# Altium PCB Controller_TRK.PcbDoc (part 2 of 2)
Units mm, origin at the board's own origin, x right, y up, seen from the top; angles counter-clockwise.
Board outline 95.06 x 95 mm, 2 copper layers (Top Layer, Bottom Layer); 192 components, 119 nets, 532 pads, 364 vias.
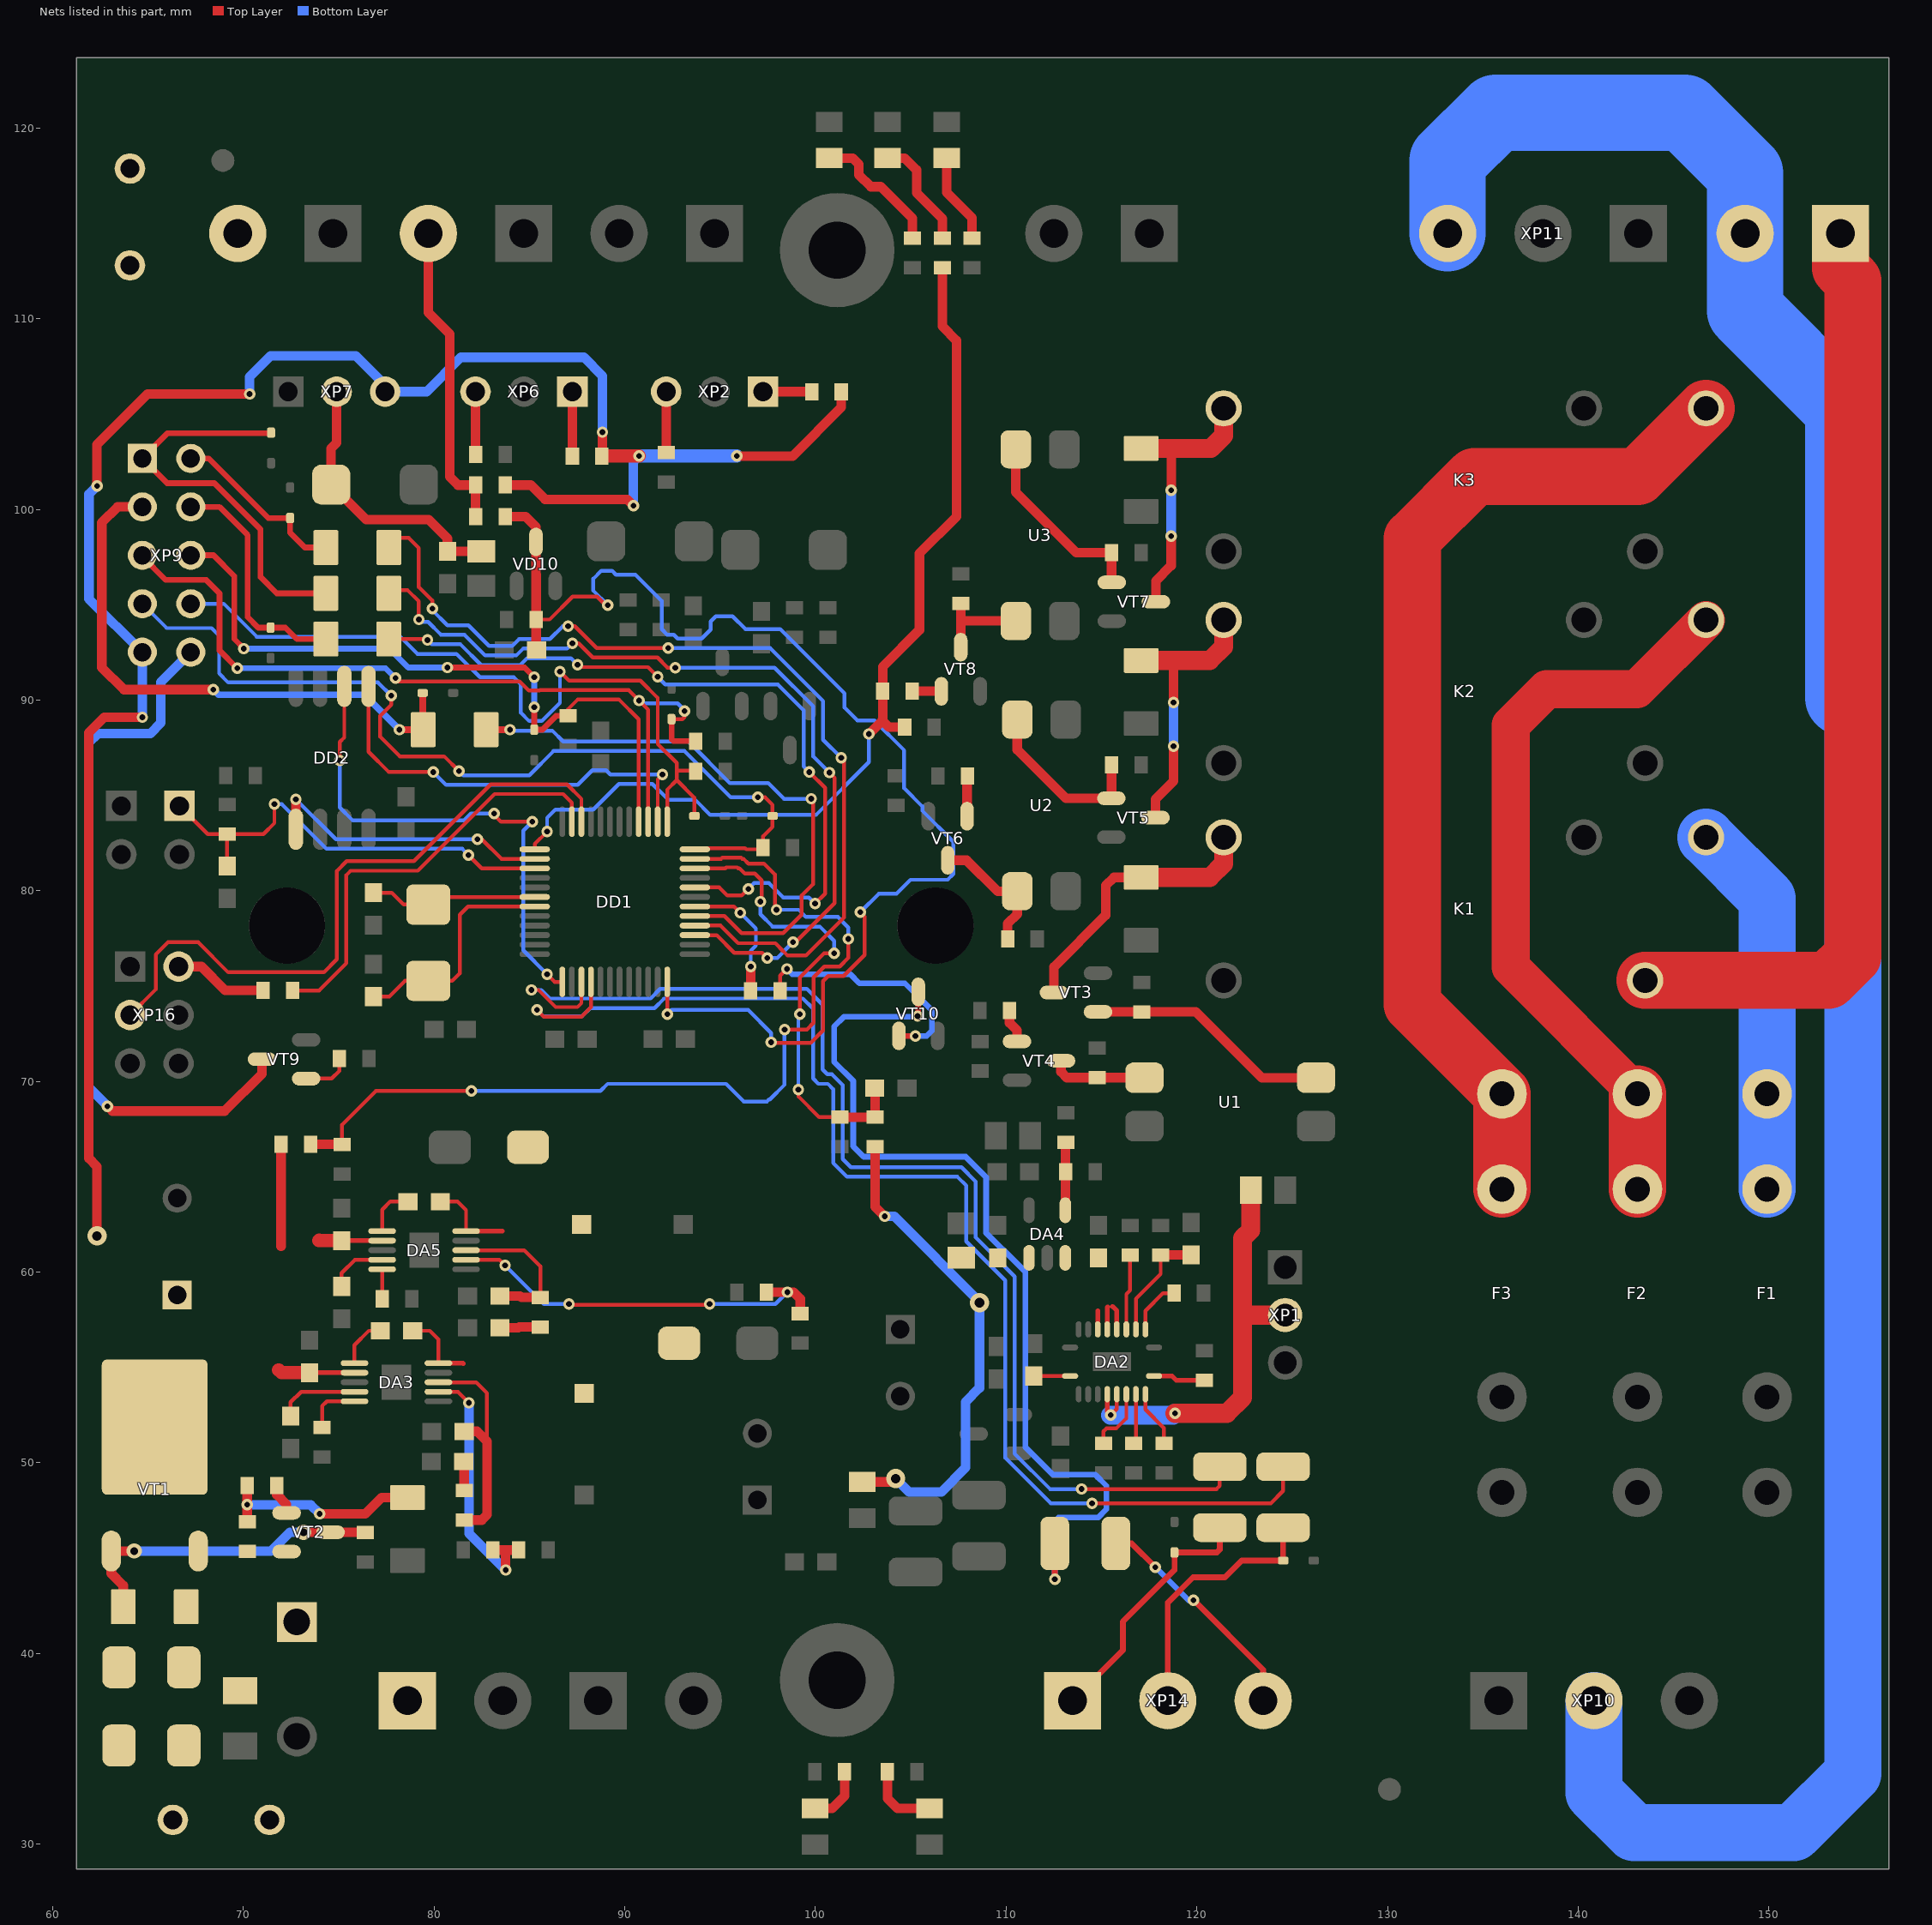
[diagram p2: the nets of this part, all layers, seen from the top]

## Via types
v1: diameter 0.6, hole 0.3, Top Layer to Bottom Layer, 357 vias
v2: diameter 1, hole 0.5, Top Layer to Bottom Layer, 5 vias
v3: diameter 0.8, hole 0.4, Top Layer to Bottom Layer, 2 vias

## Nets (pads, with @x,y where several pads share a name; then routed paths per layer and width w, separated by ;. In a path a pad name is that pad's centre, name@x,y a point inside that pad or via, vN(x,y) a via of type N, cw(c..) or ccw(c..) an arc to the next point about the centre after c; other vN are vias at no path point) (continued)
MOSI: DD1.38 DD2.5 | length 22.6
  Top Layer w0.2: DD2.5@76.56,90.718 76.56,87.29 77.625,86.225 v1(79.95,86.225) ; DD1.38@91.725,83.625 91.725,85.85 v1(91.975,86.1)
  Bottom Layer w0.2: v1(79.95,86.225) 80.621,85.554 87.529,85.554 88.3,86.325 89.015,86.325 89.24,86.1 v1(91.975,86.1)
N: XP8.2 XP10.2 XP11.3 | length 128.4
  Bottom Layer w3: XP10.2@140.825,37.525 140.825,32.702 142.925,30.602 151.302,30.602 154.4,33.7 154.4,90.125
  Bottom Layer w4: XP11.3@133.15,114.475 133.15,118.275 135.675,120.8 145.575,120.8 148.75,117.625 XP8.2@148.75,114.475 148.75,110.425 153.9,105.275 153.9,90.125
NetC1_2: C1.2 C2.2 FU1.2 VD1.2 XP7.2 | length 14.7
  Top Layer w0.5: XP7.2@74.89,106.175 74.89,103.49 74.6,103.2 VD1.2@74.6,101.3 76.435,99.465 79.71,99.465 80.7,98.475 C2.2@80.7,97.8 C1.2@82.475,97.8
NetC4_1: C4.1 DA2.1 | length 1.9
  Top Layer w0.2: C4.1@111.45,54.55 DA2.1@113.35,54.55
NetC7_2: C7.2 DA2.5 DA2.6 XP1.2 | length 23
  Top Layer w0.2: v1(115.475,52.5) 115.8,52.825 DA2.6@115.8,53.6
  Top Layer w0.25: DA2.5@115.3,53.6 115.3,52.675 v1(115.475,52.5)
  Top Layer w1: v1(118.85,52.6) 121.575,52.6 122.4,53.425 122.4,57.75 ; C7.2@122.825,64.3 122.825,62.2 122.4,61.775 122.4,57.75 ; XP1.2@124.625,57.75 122.4,57.75
  Bottom Layer w1: v1(115.475,52.5) 118.75,52.5 v1(118.85,52.6)
NetC8_1: C8.1 DA2.13 R10.1 | length 6
  Top Layer w0.2: DA2.13@116.8,57 116.8,58.6 118.1,59.9 R10.1@118.1,60.9
  Top Layer w0.5: R10.1@118.1,60.9 C8.1@119.7,60.9
NetC20_2: C20.2 R29.2 VD11.2 VD12.2 VD13.2 VD14.2 VT1.3 VT2.2
NetC21_1: C21.1 DA3.10 L1.1 VD16.2 | length 4.1
  Top Layer w0.2: C21.1@78.875,56.925 79.775,56.925 80.225,56.475 DA3.10@80.225,55.225
  Top Layer w0.25: DA3.10@80.225,55.225 81.5,55.225 81.525,55.2
NetC21_2: C21.2 DA3.1 | length 2.6
  Top Layer w0.2: DA3.1@75.825,55.225 75.825,56.175 76.575,56.925 C21.2@77.175,56.925
NetC26_1: C26.1 DA3.4 | length 4.3
  Top Layer w0.2: C26.1@72.475,52.45 72.475,53.175 73.025,53.725 DA3.4@75.825,53.725
NetC27_1: C27.1 DA3.8 R33.2 | length 11.9
  Top Layer w0.2: DA3.8@80.225,54.225 82.2,54.225 82.775,53.65 82.775,51.125
  Top Layer w0.5: R33.2@81.575,47.001 82.501,47.001 82.775,47.275 82.775,51.125 82.25,51.65 C27.1@81.575,51.65
NetC28_1: C28.1 R33.1 | length 1.5
  Top Layer w0.5: C28.1@81.55,50.075 81.575,50.05 R33.1@81.575,48.55
NetC33_1: C33.1 DA5.10 L2.1 VD17.2 | length 4.5
  Top Layer w0.2: C33.1@80.325,63.7 81.225,63.7 81.675,63.25 DA5.10@81.675,62.15
  Top Layer w0.25: DA5.10@81.675,62.15 83.575,62.15
NetC33_2: C33.2 DA5.1 | length 2.7
  Top Layer w0.2: DA5.1@77.275,62.15 77.275,63.275 77.7,63.7 C33.2@78.625,63.7
NetC38_1: C38.1 DA5.4 | length 3.1
  Top Layer w0.2: C38.1@75.15,59.25 75.15,59.95 75.85,60.65 76.2,60.65 DA5.4@77.275,60.65
NetC39_1: C39.1 DA5.8 R40.2 | length 8
  Top Layer w0.2: DA5.8@81.675,61.15 84.725,61.15 85.575,60.3 R40.2@85.575,58.674
  Top Layer w0.5: C39.1@83.45,58.75 84.5,58.75 84.576,58.674 R40.2@85.575,58.674
NetC40_1: C40.1 R40.1 | length 2.1
  Top Layer w0.5: C40.1@83.45,57.075 84.425,57.075 84.475,57.125 R40.1@85.575,57.125
NetDA2_7: DA2.7 R5.1 | length 3.4
  Top Layer w0.2: R5.1@115.1,51.025 115.1,51.65 115.25,51.8 115.765,51.8 116.3,52.335 DA2.7@116.3,53.6
NetDA2_8: DA2.8 R8.1 | length 2.5
  Top Layer w0.2: DA2.8@116.8,53.6 116.8,51.15 R8.1@116.825,51.175
NetDA2_9: DA2.9 R6.1 | length 3
  Top Layer w0.2: DA2.9@117.325,53.575 DA2.9@117.3,53.6 117.3,52.8 118.275,51.825 R6.1@118.275,51.025
NetDA2_10: DA2.10 R9.1 | length 2.7
  Top Layer w0.25: DA2.10@117.75,54.55 118.7,54.55 118.925,54.325 R9.1@120.4,54.325
NetDA2_12: DA2.12 R7.1 | length 2.9
  Top Layer w0.2: DA2.12@117.3,57 117.3,57.975 118.225,58.9 R7.1@118.8,58.9
NetDA2_14: DA2.14 R4.1 | length 4
  Top Layer w0.2: DA2.14@116.3,57 116.3,58.85 116.5,59.05 R4.1@116.5,60.9
NetDA3_5: DA3.5 R34.2 | length 2.9
  Top Layer w0.2: R34.2@74.125,51.849 74.125,52.975 74.375,53.225 DA3.5@75.825,53.225
NetDA3_7: DA3.7 R32.1 R35.2 | length 13.8
  Top Layer w0.2: DA3.7@80.225,53.725 81.25,53.725 v1(81.825,53.15)
  Top Layer w0.5: R35.2@83.074,45.425 83.75,45.425 ; v1(83.75,44.375) 83.75,45.425 ; R32.1@84.425,45.425 83.75,45.425
  Bottom Layer w0.5: v1(81.825,53.15) 81.825,46.3 v1(83.75,44.375)
NetDA4_4: DA4.4 R36.1 R38.2 | length 3.6
  Top Layer w0.5: DA4.4@113.1,63.25 113.1,66.775 R36.1@113.125,66.8
NetDA5_5: DA5.5 R41.2 | length 1.6
  Top Layer w0.2: R41.2@77.276,58.6 DA5.5@77.275,60.15
NetDA5_7: DA5.7 R39.1 R42.2 | length 20.8
  Top Layer w0.2: DA5.7@81.675,60.65 83.425,60.65 v1(83.725,60.35) ; v1(87.075,58.325) 87.118,58.282 94.407,58.282 v1(94.45,58.325)
  Top Layer w0.5: R39.1@97.425,58.95 v1(98.525,58.95) 98.85,58.95 99.2,58.6 R42.2@99.2,57.824
  Bottom Layer w0.2: v1(83.725,60.35) 85.75,58.325 v1(87.075,58.325) ; v1(94.45,58.325) 97.9,58.325 v1(98.525,58.95)
NetDD1_27: DD1.27 VD6.2 | length 45.8
  Top Layer w0.2: VD6.2@77.626,95.775 78.6,95.775 79.2,95.175 v1(79.2,94.225) ; v1(87.25,92.975) 87.575,92.975 88.32,92.23 91.71,92.23 92.24,91.7 v1(92.65,91.7) ; DD1.27@93.675,77.675 94.811,77.675 95.736,76.75 97.2,76.75 v1(97.475,76.475) ; v1@98.825,77.425 v1(98.825,77.3) 98.95,77.3 101,79.35 101,85.925 v1(100.725,86.2)
  Bottom Layer w0.2: v1(79.2,94.225) 79.325,94.1 79.69,94.1 80.35,93.44 80.35,93.425 81.589,93.425 82.675,92.339 84.307,92.339 84.668,92.7 86.975,92.7 v1(87.25,92.975) ; v1(92.65,91.7) 97.857,91.7 99.875,89.682 99.875,87.05 v1(100.725,86.2) ; v1(97.475,76.475) 98,76.475 v1(98.825,77.3)
NetDD1_28: DD1.28 VD27.2 | length 49.8
  Top Layer w0.2: VD27.2@77.576,98.5 78.675,98.5 79.2,97.975 79.2,95.925 79.904,95.221 v1(79.904,94.805) ; v1(87.029,93.88) 87.378,93.88 88.528,92.73 v1(92.28,92.73) ; DD1.28@93.675,78.175 95.019,78.175 95.944,77.25 97.9,77.25 98.125,77.025 98.125,77.01 98.535,76.6 99.5,76.6 101.5,78.6 101.5,86.825 v1(101.35,86.975)
  Bottom Layer w0.2: v1(79.904,94.805) 79.904,94.721 80.7,93.925 81.796,93.925 82.882,92.839 84.1,92.839 84.461,93.2 86.075,93.2 86.755,93.88 v1(87.029,93.88) ; v1(92.28,92.73) 97.62,92.73 100.4,89.95 100.4,87.925 v1(101.35,86.975)
NetDD1_29: DD1.29 VD24.2 | length 31.3
  Top Layer w0.2: DD1.29@93.675,78.675 95.226,78.675 96.126,77.775 98.3,77.775 99.275,78.75 99.275,79.75 99.875,80.35 99.875,84.725 v1(99.775,84.825)
  Top Layer w0.35: VD24.2@82.726,88.45 v1(83.975,88.45)
  Bottom Layer w0.2: v1(83.975,88.45) 84.025,88.4 86.196,88.4 86.771,87.825 93.332,87.825 95.507,85.65 97.525,85.65 98.35,84.825 v1(99.775,84.825)
NetDD1_30: DD1.30 R62.1 | length 7.1
  Top Layer w0.2: DD1.30@93.675,79.175 95.725,79.175 v1(96.05,78.85)
  Top Layer w0.5: R62.1@96.6,74.75 v1@96.6,76.024
  Bottom Layer w0.2: v1(96.05,78.85) 96.875,78.025 96.875,77.125 96.605,76.855 v1(96.605,76.029)
NetDD1_32: DD1.32 VD28.2 | length 41.7
  Top Layer w0.2: VD28.2@77.626,93.2 79.7,93.2 v1(79.65,93.15) ; v1(87.525,91.85) 87.645,91.73 91.22,91.73 v1(91.725,91.225) ; DD1.32@93.675,80.175 94.95,80.175 95.375,79.75 96.125,79.75 v1(96.475,80.1) ; v1(99.675,86.225) 100.5,85.4 100.5,79.85 v1(99.975,79.325)
  Bottom Layer w0.2: v1(79.65,93.15) 79.875,92.925 81.382,92.925 82.475,91.832 84.507,91.832 84.875,92.2 87.175,92.2 v1(87.525,91.85) ; v1(91.725,91.225) 92.125,90.825 98.025,90.825 99.375,89.475 99.375,86.525 v1(99.675,86.225) ; v1(96.475,80.1) 96.775,80.4 97.562,80.4 98.312,79.65 99.65,79.65 v1(99.975,79.325)
NetDD1_36: DD1.36 R2.2 VD33.2 XP9.7 | length 47.8
  Top Layer w0.2: v1(77.754,90.229) 77.754,89.754 77.175,89.175 77.175,88.075 78.2,87.05 80.525,87.05 v1(81.3,86.275) ; DD1.36@93.675,82.175 93.729,82.229 96.309,82.229 96.363,82.175 97.151,82.175 R2.2@97.251,82.275 97.251,82.851 97.75,83.35 VD33.2@97.75,83.925 97.75,84.5 97.35,84.9 v1(96.975,84.9)
  Bottom Layer w0.2: XP9.7@64.7,95.055 65.98,93.775 68.325,93.775 68.725,93.375 68.725,91.4 69.2,90.925 77.058,90.925 v1(77.754,90.229) ; v1(81.3,86.275) 81.521,86.054 84.989,86.054 86.26,87.325 93.125,87.325 95.55,84.9 v1(96.975,84.9)
NetDD1_37: DD1.37 R1.2 VD34.2 XP9.8 | length 40.9
  Top Layer w0.2: v1(86.6,91.5) 87.075,91.025 90.814,91.025 91.725,90.114 91.725,87.7 92.725,86.7 92.725,86.3 ; DD1.37@92.225,83.625 92.225,85.3 92.725,85.8 ; VD34.2@93.65,83.925 93.65,84.875 92.725,85.8 ; R1.2@93.726,86.275 93.701,86.3 92.725,86.3 ; 92.725,85.8 92.725,86.3
  Bottom Layer w0.2: XP9.8@67.55,95.055 68.97,95.055 70.7,93.325 78.225,93.325 79.125,92.425 81.175,92.425 82.4,91.2 84.175,91.2 84.55,90.825 84.55,89.335 84.985,88.9 85.65,88.9 86.6,89.85 v1(86.6,91.5)
  Bottom Layer w0.3: XP9.8@67.24,95.055 XP9.8@67.55,95.055
NetDD1_39: DD1.39 R60.2 VD31.2 XP9.5 | length 43.5
  Top Layer w0.2: v1@78.025,91.1 78.14,90.985 84.475,90.985 84.96,90.5 85.54,90.5 85.565,90.525 90.2,90.525 91.225,89.5 DD1.39@91.225,83.625 ; VD31.2@92.45,89 93.025,89 93.13,89.105 v1(93.13,89.429)
  Top Layer w0.3: XP9.5@64.7,97.595 64.7,97.525 65.925,96.3 68.05,96.3 68.75,95.6 68.75,92.6 v1(69.675,91.675) ; VD31.2@92.45,89 92.45,87.95 92.55,87.85 R60.2@93.726,87.85
  Bottom Layer w0.2: v1(90.75,89.975) 90.9,89.825 92.775,89.825 93.13,89.47 v1(93.13,89.429)
  Bottom Layer w0.3: v1(69.675,91.675) 77.45,91.675 v1(77.975,91.15)
NetDD1_40: DD1.40 R3.2 VD32.2 XP9.6 | length 37.5
  Top Layer w0.2: R3.2@87.025,89.174 87.025,89.525 87.525,90.025 89.7,90.025 90.725,89 DD1.40@90.725,83.625
  Top Layer w0.3: XP9.6@67.24,97.595 68.43,97.595 69.525,96.5 69.525,93.2 v1(70.025,92.7) ; v1(80.704,91.704) 84.746,91.704 v1(85.25,91.2) ; v1(85.25,89.625) VD32.2@85.25,88.45 85.675,88.45 86.399,89.174 R3.2@87.025,89.174
  Bottom Layer w0.3: v1(70.025,92.7) 77.65,92.7 78.646,91.704 v1(80.704,91.704) ; v1(85.25,89.625) v1(85.25,91.2)
NetF1_2: F1.2 K1.14 | length 19.8
  Bottom Layer w3: K1.14@146.7,82.8 149.9,79.6 F1.2@149.9,69.35 F1.2@149.9,64.35
NetF2_2: F2.2 K2.14 | length 39.6
  Top Layer w2: F2.2@143.1,69.35 136.45,76 136.45,88.675 138.35,90.575 143.075,90.575 K2.14@146.7,94.2
  Top Layer w3: F2.2@143.1,64.35 F2.2@143.1,69.35
NetF3_2: F3.2 K3.14 | length 54.3
  Top Layer w3: F3.2@136,64.35 F3.2@136,69.35 131.3,74.05 131.3,98.475 134.55,101.725 143.125,101.725 K3.14@146.7,105.3
NetFU4_2: FU4.2 VD11.1 VD12.1
NetFU5_1: FU5.1 VD35.2 XP14.1 | length 13.6
  Top Layer w0.3: XP14.1@113.475,37.525 116.125,40.175 116.125,41.675 118.825,44.375 VD35.2@118.825,45.3 121.05,45.3 121.2,45.45 FU5.1@121.2,46.6
NetFU6_1: FU6.1 VD36.2 XP14.2 | length 13.8
  Top Layer w0.3: XP14.2@118.475,37.525 118.475,42.675 119.8,44 121.475,44 122.35,44.875 VD36.2@124.525,44.875 FU6.1@124.525,46.6
NetFU7_1: FU7.1 VT10.3 | length 49.4
  Top Layer w0.3: v1(105.35,73.425) 105.391,73.466 VT10.3@105.391,74.699 ; v1(112.55,43.9) FU7.1@112.55,45.775
  Bottom Layer w0.3: v1(105.35,73.425) 105.325,73.4 101.5,73.4 100.975,72.875 100.975,71.035 101.975,70.035 101.975,66.6 102.525,66.05 107.878,66.05 108.95,64.978 108.95,62.053 109.853,61.15 109.875,61.15 111,60.025 111,50.825 112.45,49.375 114.675,49.375 115.256,48.794 115.256,47.567 114.816,47.127 112.752,47.127 112.55,46.925 v1(112.55,43.9)
NetFU7_2: FU7.2 XP14.3 | length 12.1
  Top Layer w0.3: FU7.2@115.75,45.775 116.575,45.775 v1(117.825,44.525) ; v1(119.825,42.8) 123.475,39.15 XP14.3@123.475,37.525
  Bottom Layer w0.3: v1(117.825,44.525) 119.55,42.8 v1(119.825,42.8)
NetK1_2: K1.2 VD18.1 VT3.3 | length 14.8
  Top Layer w0.5: VT3.3@112.501,74.666 112.501,76.001 115.225,78.725 115.225,80.275 115.651,80.701 VD18.1@117.075,80.701
  Top Layer w1: VD18.1@117.075,80.701 120.676,80.701 121.4,81.425 K1.2@121.4,82.8
NetK2_2: K2.2 VD19.1 VT5.3 | length 14.6
  Top Layer w0.5: VT5.3@117.824,83.834 117.824,84.799 118.775,85.75 v1(118.775,87.575) ; v1(118.775,89.875) 118.775,91.976
  Top Layer w1: VD19.1@117.075,92.076 120.676,92.076 121.4,92.8 K2.2@121.4,94.2
  Bottom Layer w0.5: v1(118.775,87.575) v1(118.775,89.875)
NetK3_2: K3.2 VD20.1 VT7.3 | length 14.4
  Top Layer w0.5: VT7.3@117.849,95.159 117.849,96.249 118.65,97.05 v1(118.65,98.6) ; v1(118.656,101.005) 118.656,103.107 118.75,103.201
  Top Layer w1: VD20.1@117.075,103.201 118.75,103.201 120.726,103.201 121.4,103.875 K3.2@121.4,105.3
  Bottom Layer w0.5: v1(118.65,98.6) 118.65,100.999 v1(118.656,101.005)
NetR11_2: R11.2 XP2.1 | length 2.6
  Top Layer w0.5: XP2.1@97.25,106.175 R11.2@99.801,106.175
NetR12_2: R12.2 XP2.3 | length 3.2
  Top Layer w0.5: XP2.3@92.17,106.175 92.17,102.979 R12.2@92.175,102.974
NetR13_2: R13.2 XP6.1 | length 3.4
  Top Layer w0.5: R13.2@87.25,102.801 XP6.1@87.25,106.175
NetR14_2: R14.2 XP6.3 | length 3.2
  Top Layer w0.5: R14.2@82.17,102.994 XP6.3@82.17,106.175
NetR16_1: R16.1 VD7.1 | length 3.1
  Top Layer w0.5: VD7.1@99.975,31.875 100.875,31.875 101.525,32.525 R16.1@101.525,33.8
NetR17_1: R17.1 VD8.1 | length 3.8
  Top Layer w0.5: R17.1@103.775,33.8 103.775,32.4 104.3,31.875 VD8.1@105.975,31.875
NetR18_2: R18.2 XP16.2 | length 4.9
  Top Layer w0.5: XP16.2@66.6,76.025 67.8,76.025 69.05,74.775 R18.2@71.026,74.775
NetR29_1: R29.1 R30.2 VD15.2 | length 10.8
  Top Layer w0.5: R29.1@70.2,46.9 v1(70.2,47.8) R30.2@70.2,48.799 ; v1(74,47.325) 76.4,47.325 77.251,48.176 VD15.2@78.6,48.176
  Bottom Layer w0.5: v1(70.2,47.8) 73.525,47.8 v1(74,47.325)
NetR30_1: R30.1 VT2.1 | length 1.6
  Top Layer w0.5: R30.1@71.75,48.8 71.75,48.325 72.263,47.812 VT2.1@72.263,47.375
NetR31_2: R31.2 VD13.1 VT1.1 VT2.3 | length 16.9
  Top Layer w0.5: VD13.1@63.699,42.45 63.699,43.576 63.07,44.205 VT1.1@63.07,45.375 v3(64.275,45.375) ; v3(73.154,46.352) 74.567,46.352 VT2.3@74.574,46.359 76.39,46.359 R31.2@76.4,46.349
  Bottom Layer w0.5: v3(64.275,45.375) 71.45,45.375 72.427,46.352 v3(73.154,46.352)
NetR43_1: R43.1 U1.4 VT3.1 | length 12.9
  Top Layer w0.5: VT3.1@114.812,73.65 R43.1@117.1,73.65 119.95,73.65 123.405,70.195 U1.4@126.25,70.195
NetR44_1: R44.1 U1.1 VT4.3 | length 5.1
  Top Layer w0.5: VT4.3@112.874,71.084 112.874,70.501 113.175,70.2 R44.1@114.775,70.2 117.245,70.2 U1.1@117.25,70.195
NetR45_1: R45.1 VT4.1 | length 1.8
  Top Layer w0.5: R45.1@110.175,73.725 110.175,73.075 110.563,72.687 VT4.1@110.563,72.1
NetR47_1: R47.1 U2.4 VT5.1 | length 9.3
  Top Layer w0.5: U2.4@110.58,88.975 110.58,87.395 113.125,84.85 VT5.1@115.513,84.85 115.525,84.862 R47.1@115.525,86.6
NetR48_1: R48.1 U2.1 VT6.3 | length 7
  Top Layer w0.5: VT6.3@106.934,81.601 107.924,81.601 109.55,79.975 U2.1@110.58,79.975 110.58,78.78 110.075,78.275 R48.1@110.075,77.475
NetR49_1: R49.1 VT6.1 | length 2.1
  Top Layer w0.5: VT6.1@107.95,83.912 107.95,86 R49.1@107.975,86.025
NetR51_1: R51.1 U3.4 VT7.1 | length 10.1
  Top Layer w0.5: U3.4@110.505,103.15 110.505,100.895 113.675,97.725 R51.1@115.525,97.725 115.525,96.188 VT7.1@115.538,96.175
NetR52_1: R52.1 U3.1 VT8.3 | length 5.1
  Top Layer w0.5: VT8.3@107.625,92.783 R52.1@107.625,95.075 ; 107.675,94.15 U3.1@110.505,94.15
NetR53_1: R53.1 VT8.1 | length 1.5
  Top Layer w0.5: R53.1@105.075,90.475 106.588,90.475 VT8.1@106.6,90.463
NetR55_2: R55.2 VD21.1 | length 7
  Top Layer w0.5: VD21.1@100.725,118.425 101.95,118.425 102.275,118.1 102.275,117.55 102.9,116.925 103.425,116.925 105.075,115.275 R55.2@105.075,114.224
NetR56_2: R56.2 VD22.1 | length 4.7
  Top Layer w0.5: VD22.1@106.875,118.425 106.875,116.625 108.2,115.3 R56.2@108.2,114.224
NetR57_2: R57.2 VD23.1 | length 5.9
  Top Layer w0.5: VD23.1@103.775,118.425 104.675,118.425 105.3,117.8 105.3,116.6 106.65,115.25 R57.2@106.65,114.224
NetR61_2: R61.2 VT9.1 | length 2.6
  Top Layer w0.2: VT9.1@73.287,70.15 74.625,70.15 75.026,70.551 R61.2@75.026,71.2
NetR62_2: R62.2 VT10.1 | length 12.7
  Top Layer w0.2: R62.2@98.149,74.75 98.149,75.549 v1(98.5,75.9)
  Top Layer w0.3: VT10.1@104.375,72.388 v1(105.237,72.388)
  Bottom Layer w0.3: v1(98.5,75.9) 98.775,75.625 101.825,75.625 102.3,75.15 104.686,75.15 106.1,73.736 106.1,72.65 105.838,72.388 v1(105.237,72.388)
NetVD6_1: VD6.1 VD26.2 XP9.1 | length 21.3
  Top Layer w0.3: VD26.2@71.45,104.025 71.425,104 66.025,104 XP9.1@64.7,102.675 66,101.375 68.475,101.375 70.9,98.95 70.9,96.45 71.75,95.6 VD6.1@74.324,95.6
NetVD24_1: VD24.1 VD25.2 XP9.3 | length 30.3
  Top Layer w0.35: v1(78.175,88.45) 79.376,88.45 79.4,88.474 VD25.2@79.4,90.375
  Top Layer w0.5: XP9.3@64.84,100.135 XP9.3@64.7,100.135 63.41,100.135 62.575,99.3 62.575,91.7 63.725,90.55 v1(68.425,90.55)
  Bottom Layer w0.35: v1(68.425,90.55) 68.7,90.275 76.35,90.275 v1(78.175,88.45)
NetVD27_1: VD27.1 VD29.2 XP9.2 | length 9.5
  Top Layer w0.3: XP9.2@67.24,102.675 68.175,102.675 71.3,99.55 VD29.2@72.45,99.55 72.45,98.775 73.225,98 VD27.1@74.324,98
NetVD28_1: VD28.1 VD30.2 XP9.4 | length 12.5
  Top Layer w0.3: XP9.4@67.24,100.135 68.74,100.135 70.225,98.65 70.225,94.35 70.775,93.8 VD30.2@71.425,93.8 72.2,93.8 72.8,93.2 VD28.1@74.324,93.2
NetVT9_3: VT9.3 XP9.10 | length 37.8
  Top Layer w0.5: v1(62.875,68.7) 63.125,68.45 69.025,68.45 70.976,70.401 VT9.3@70.976,71.166
  Bottom Layer w0.5: v1(62.875,68.7) 61.888,69.687 61.888,87.763 62.375,88.25 65.125,88.25 65.675,88.8 65.675,90.95 XP9.10@67.24,92.515
PISTOL: R15.1 R27.1 XP12.2 | length 16.4
  Top Layer w0.5: XP12.2@79.7,114.475 79.7,110.325 80.82,109.205 80.82,101.705 81.25,101.275 R15.1@82.175,101.275 R27.1@82.175,99.625
PISTOL_MCU: C19.2 DD1.24 R27.2 R28.2 VD10.3 | length 70.5
  Top Layer w0.2: R28.2@85.349,94.225 86.058,94.225 87.258,95.425 88.55,95.425 89,94.975 89.005,94.98 v1(89.104,94.98) ; v1(92.225,73.525) DD1.24@92.225,75.225 ; v1(97.68,72.054) 97.708,72.025 99.75,72.025 100.4,72.675 100.4,75.261 100.664,75.525 101.472,75.525 102.58,76.633 102.58,78.645 v1(102.35,78.875)
  Top Layer w0.5: R27.2@83.724,99.625 84.8,99.625 85.341,99.084 VD10.3@85.341,98.299 85.341,95.559 ; 85.349,96.592 R28.2@85.349,94.225 85.349,92.651 C19.2@85.375,92.625
  Bottom Layer w0.2: v1(89.104,94.98) 88.35,95.734 88.35,96.365 88.76,96.775 89.34,96.775 89.54,96.575 90.557,96.575 91.935,95.197 91.935,93.715 92.22,93.43 92.569,93.43 92.769,93.23 94.03,93.23 94.5,93.7 94.5,94.125 94.775,94.4 95.65,94.4 96.32,93.73 98.145,93.73 101.525,90.35 101.525,89.6 102.2,88.925 103.09,88.925 104.65,87.365 104.65,85.375 105.6,84.425 105.6,84.197 107.225,82.572 107.225,80.875 106.927,80.577 104.977,80.577 104.25,79.85 103.325,79.85 v1(102.35,78.875) ; v1(92.225,73.525) 92.45,73.75 96.469,73.75 97.675,72.544 97.675,72.058 v1(97.68,72.054)
PUMP_L: K1.11 XP8.1 | length 49.6
  Top Layer w3: K1.11@143.5,75.3 153.125,75.3 154.4,76.575 154.4,112 153.75,112.65 XP8.1@153.75,114.475
PUMP_RELAY: DD1.1 R53.2 R54.2 R57.1 | length 50.8
  Top Layer w0.2: DD1.1@85.275,82.175 85.275,82.45 v1(85.925,83.1) ; 103.474,88.899 103.526,88.899
  Top Layer w0.5: v1(102.8,88.225) 103.474,88.899 ; R54.2@104.676,88.575 103.85,88.575 103.526,88.899 R53.2@103.526,90.475 103.526,91.751 105.45,93.675 105.45,97.681 107.4,99.631 107.4,108.85 106.65,109.6 R57.1@106.65,112.675
  Bottom Layer w0.2: v1(85.925,83.1) 85.925,83.825 86.354,84.254 88.344,84.254 89.69,85.6 91.45,85.6 92.271,84.779 93.681,84.779 94.485,83.975 100.025,83.975 102.8,86.75 v1(102.8,88.225)
RESET: C15.2 DD1.3 J1.1 R23.2 | length 23.5
  Top Layer w0.2: J1.1@66.65,84.45 68.124,82.976 R23.2@69.15,82.976 ; C15.2@69.15,81.3 R23.2@69.15,82.976 ; v1(71.625,84.55) 71.625,83.55 71.051,82.976 R23.2@69.15,82.976 ; v1(81.8,81.875) 82.5,81.175 DD1.3@85.275,81.175
  Bottom Layer w0.2: v1(71.625,84.55) 72.01,84.55 74.36,82.2 81.475,82.2 v1(81.8,81.875)
RXD: DD1.46 XP16.3 | length 35.3
  Top Layer w0.2: XP16.3@64.06,73.485 65.4,74.825 65.4,76.65 66.05,77.3 67.625,77.3 69.2,75.725 74.218,75.725 74.9,76.407 74.9,81.032 75.418,81.55 78.943,81.55 82.968,85.575 86.975,85.575 87.725,84.825 DD1.46@87.725,83.625
SCK: DD1.13 DD2.6 | length 26.9
  Top Layer w0.2: v1@75.071,86.829 v1(75.054,86.829) 75.054,87.804 75.29,88.04 DD2.6@75.29,90.718 ; v1@83.125,84 83.5,83.625 v1(85.15,83.625) ; v1(85.925,75.625) 86.325,75.225 DD1.13@86.725,75.225
  Bottom Layer w0.2: v1(75.054,86.829) 75.05,86.826 75.05,84.372 75.722,83.7 81.578,83.7 81.932,84.054 v1(83.154,84.054) ; v1(85.15,83.625) 84.675,83.15 84.675,76.875 v1(85.925,75.625)
SCL: DD1.15 FU5.2 | length 64.1
  Top Layer w0.2: v1(85.1,74.8) 85.475,74.8 86.375,73.9 87.518,73.9 87.725,74.107 DD1.15@87.725,75.225 ; v1(113.95,48.625) 121.025,48.625 121.2,48.8 FU5.2@121.2,49.8
  Bottom Layer w0.2: v1(85.1,74.8) 85.625,74.8 86.075,74.35 91.353,74.35 91.853,74.85 99.547,74.85 100.375,74.022 100.375,70.625 100.625,70.375 100.857,70.375 101.425,69.807 101.425,65.932 101.857,65.5 107.65,65.5 108.4,64.75 108.4,61.825 110.45,59.775 110.45,50.475 112.3,48.625 v1(113.95,48.625)
SDA: DD1.16 FU6.2 | length 68.2
  Top Layer w0.2: v1(85.4,73.75) 85.75,73.4 87.725,73.4 88.225,73.9 DD1.16@88.225,75.225 ; v1(114.506,47.877) 123.877,47.877 124.525,48.525 FU6.2@124.525,49.8
  Bottom Layer w0.2: v1(85.4,73.75) 85.725,73.425 87.76,73.425 88.185,73.85 91.56,73.85 92.06,74.35 99.34,74.35 99.875,73.815 99.875,70.15 100.15,69.875 100.65,69.875 100.925,69.6 100.925,65.725 101.65,65 107.443,65 107.9,64.543 107.9,61.618 109.95,59.568 109.95,50.268 112.341,47.877 v1(114.506,47.877)
SS: DD1.2 DD2.1 | length 15.4
  Top Layer w0.2: v1(82.275,82.7) 82.5,82.7 83.525,81.675 DD1.2@85.275,81.675
  Top Layer w0.5: DD2.1@72.75,83.225 v1(72.75,84.8)
  Bottom Layer w0.2: v1(72.75,84.8) 74.85,82.7 v1(82.275,82.7)
TXD: DD1.47 R18.1 | length 22.8
  Top Layer w0.2: R18.1@72.575,74.775 73.975,74.775 75.4,76.2 75.4,80.825 75.625,81.05 79.15,81.05 83.175,85.075 86.768,85.075 87.225,84.618 DD1.47@87.225,83.625
V_IN: DD1.35 R19.1 R21.2 | length 49.1
  Top Layer w0.2: R21.2@75.175,66.699 75.174,67.724 76.95,69.5 v1(81.95,69.5) ; DD1.35@93.675,81.675 95.054,81.675 95.108,81.729 96.102,81.729 96.156,81.675 96.225,81.675 96.475,81.425 97.3,81.425 97.875,80.85 97.875,79.084 v1(97.955,79.004) ; v1@98.282,72.825 v1(98.382,72.725) 99.55,72.725 99.9,73.075 99.9,75.468 100.457,76.025 101.265,76.025 101.725,76.485 v1(101.725,77.475)
  Top Layer w0.5: R19.1@73.525,66.7 R21.2@75.175,66.699
  Bottom Layer w0.2: v1(81.95,69.5) 88.725,69.5 89.1,69.875 95.31,69.875 96.235,68.95 97.46,68.95 97.56,69.05 97.6,69.05 98.38,69.83 v1@98.38,72.725 ; v1(97.955,79.004) 99.121,79.004 99.5,78.625 101.175,78.625 101.725,78.075 v1(101.725,77.475)
V_SYS: C13.2 DD1.34 R20.1 R22.2 | length 25.4
  Top Layer w0.2: DD1.34@93.675,81.175 95.261,81.175 95.315,81.229 95.895,81.229 95.949,81.175 96.018,81.175 96.293,80.9 96.825,80.9 97.18,80.545 97.18,79.504 v1(97.105,79.429) ; v1(99.1,69.575) 99.1,69.221 100.197,68.124 R22.2@101.275,68.124 ; v1@99.275,73.625 v1(99.175,73.525) 99.175,75.45 100.45,76.725 v1(100.975,76.725)
  Top Layer w0.5: R22.2@101.275,68.124 R20.1@103.125,68.125 ; R20.1@103.125,68.125 C13.2@103.125,69.625
  Bottom Layer w0.2: v1(97.105,79.429) 97.105,78.77 97.75,78.125 100.225,78.125 100.975,77.375 v1(100.975,76.725) ; v1(99.1,69.575) 99.1,73.45 v1(99.175,73.525)
VBAT: C6.2 C31.2 C32.1 DA2.15 DA2.16 DA2.17 DA4.1 DA4.3 R20.2 R37.2 | length 29.5
  Top Layer w0.25: DA2.17@114.8,57 114.8,57.975 ; DA2.16@115.3,57 115.3,58.15 115.325,58.175 ; 115.575,58.2 115.8,57.975 DA2.15@115.8,57
  Top Layer w0.5: R37.2@102.45,49 104.025,49 v2(104.2,49.175) ; R20.2@103.125,66.576 103.125,63.425 v1(103.625,62.925)
  Bottom Layer w0.5: v1(103.625,62.925) 104.126,62.925 108.6,58.451 v2(108.6,58.4) 108.6,53.925 107.875,53.2 107.875,49.748 106.602,48.475 104.9,48.475 v2(104.2,49.175)
VIN: FU4.1 XP3.1
VIN_F: C24.2 C25.1 C37.1 DA3.2 DA5.2 R11.1 R13.1 R15.2 R19.2 VT1.2 XP7.3 XP9.9 | length 117.6
  Top Layer w0.25: C25.1@73.475,54.725 DA3.2@75.825,54.725 ; C37.1@75.15,61.65 DA5.2@77.275,61.65
  Top Layer w0.5: v2(62.325,61.9) 62.325,65.538 61.888,65.975 61.888,88.288 62.7,89.1 v1(64.7,89.1) ; v1(62.325,101.225) 62.325,103.4 64.975,106.05 v1(70.325,106.05) ; 71.976,61.349 R19.2@71.976,66.7 ; R15.2@83.724,101.275 85.075,101.275 85.825,100.525 90.125,100.525 v1(90.45,100.2) ; R13.1@88.8,102.8 88.825,102.825 v1(88.825,104.05) ; v1(95.875,102.8) 98.8,102.8 101.35,105.35 R11.1@101.35,106.175
  Top Layer w0.7: 71.85,54.875 72,54.725 C25.1@73.475,54.725 ; 73.975,61.675 73.95,61.65 C37.1@75.15,61.65 ; R13.1@88.8,102.8 v1(90.75,102.8)
  Bottom Layer w0.5: v1(62.325,101.225) 61.9,100.8 61.9,95.315 XP9.9@64.7,92.515 v1@64.7,89.225 ; v1(70.325,106.05) 70.325,106.95 71.425,108.05 75.9,108.05 77.43,106.52 XP7.3@77.43,106.175 79.6,106.175 81.4,107.975 87.85,107.975 88.825,107 v1(88.825,104.05) ; v1(90.45,100.2) 90.45,102.5 v1(90.75,102.8)
  Bottom Layer w0.7: v1(90.75,102.8) v1(95.875,102.8)
VOUT_F: FU1.1 XP15.2
XTAL1: C17.2 DD1.6 QR1.1 | length 8.9
  Top Layer w0.2: C17.2@76.827,79.9 77.775,79.9 78.4,79.275 79.8,79.275 80.2,79.675 DD1.6@85.275,79.675
XTAL2: C16.2 DD1.7 QR1.2 | length 12.2
  Top Layer w0.2: C16.2@76.825,74.45 77.65,74.45 78.475,75.275 79.8,75.275 80.95,75.275 81.35,75.675 81.35,78.75 81.775,79.175 DD1.7@85.275,79.175
pads on no net: DA2.2 DA2.3 DA2.18 DA3.3 DA3.6 DA5.3 DA5.6 DD1.14 DD1.22 DD1.23 DD1.31 DD1.42 DD1.43 DD1.48 K1.12 K2.12 K3.12 REP1.1 REP2.1 XP1.3 XP16.1 XP16.4 XP16.6

## Polygon pours and split planes (outlines as drawn)
GND on Top Layer "GND_L01_P036" (hatched 90Degree grid 0.15 track 0.2, remove dead copper, pour order 36): 61.238,123.702 151.3,123.702 151.3,28.702 61.238,28.702
VIN on Top Layer "VIN_L01_P000" (hatched 90Degree grid 0.15 track 0.2, remove dead copper, pour order 0): 75.75,40.25 75.75,36.725 75.75,34.3 75.225,33.775 74.375,32.925 72.725,32.925 69.9,32.925 69.3,32.325 69.025,32.05 69.025,28.702 78.727,28.702 79.75,29.725 81.2,31.175 81.2,33.375 81.2,40.25
NetFU4_2 on Top Layer "NETFU4_2_L01_P002" (hatched 90Degree grid 0.15 track 0.2, remove dead copper, pour order 2): 67.875,32.375 67.875,28.702 61.238,28.702 61.238,37.1 67.95,37.1 68.225,36.825 68.3,36.75 68.3,35.95 68.3,33.6 67.875,33.175
NetC20_2 on Top Layer "NETC20_2_L01_P004" (hatched 90Degree grid 0.15 track 0.2, remove dead copper, pour order 4): 61.625,41.125 65,41.125 65.25,41.125 65.525,41.4 65.825,41.7 65.825,42.9 65.825,46.025 66.35,46.55 66.525,46.725 67.475,46.725 68.35,46.725 68.725,46.35 69.025,46.05 69.875,46.05 73.025,46.05 73.675,45.4 74.65,44.425 74.65,40.925 74.65,39.7 73.95,39 72.05,37.1 70.375,37.1 68.6,37.1 68.075,37.625 67.9,37.8 66.3,37.8 62.025,37.8 61.625,38.2
VIN_F on Top Layer "VIN_F_L01_P006" (hatched 90Degree grid 0.15 track 0.2, remove dead copper, pour order 6): 61.238,47.875 64.05,47.875 68.45,47.875 69.025,48.45 69.2,48.625 69.2,49.225 69.2,49.575 69.5,49.875 69.5,52.225 69.5,52.6 70.075,53.175 71.075,54.175 73.225,54.175 74.25,54.175 74.25,55.125 74.25,55.35 72.55,55.35 72.175,55.35 72,55.525 72,56.9 72,58.825 72.775,59.6 74.225,61.05 75.1,61.05 75.725,61.05 75.725,62.025 75.725,62.5 72.65,62.5 61.238,62.5
NetC21_1 on Top Layer "NETC21_1_L01_P010" (hatched 90Degree grid 0.15 track 0.2, remove dead copper, pour order 10): 87.225,52.125 83.875,52.125 83.525,52.475 83.3,52.7 83.3,53.5 83.3,53.725 82.6,54.425 82.25,54.775 81.9,54.775 81.825,54.775 81.575,55.025 81.525,55.075 81.525,55.525 81.525,55.625 81.625,55.725 81.7,55.8 82.15,55.8 89.825,55.8 90.225,56.2 91.425,57.4 93.3,57.4 94.025,57.4 94.3,57.125 94.6,56.825 94.6,54.925 94.15,54.475 93.9,54.225 93.425,54.225 93.125,54.225 92.7,53.8 92.075,53.175 92.075,52.125
+4V3 on Top Layer "+4V3_L01_P012" (hatched 90Degree grid 0.15 track 0.2, remove dead copper, pour order 12): 83.6,49.75 83.6,47.35 84,46.95 84.45,46.5 85.175,46.5 85.275,46.5 85.375,46.4 85.5,46.275 85.5,45.775 85.5,44.7 85.725,44.475 85.85,44.35 87.075,44.35 91.05,44.35 94.325,44.35 97.4,44.35 97.675,44.075 97.975,43.775 99.1,43.775 99.275,43.775 99.4,43.9 99.675,44.175 99.675,45.1 99.675,45.6 99.675,45.675 99.9,45.9 99.975,45.975 100.925,45.975 102.325,45.975 102.4,46.05 102.575,46.225 102.575,46.825 102.575,48.175 102.5,48.25 102.275,48.475 101.65,48.475 99.875,48.475 99.65,48.7 99.075,49.275 96.975,49.275 95.75,49.275 95.525,49.5 95.275,49.75 91.875,49.75
NetC33_1 on Top Layer "NETC33_1_L01_P014" (hatched 90Degree grid 0.15 track 0.2, remove dead copper, pour order 14): 82.75,62.25 82.75,63.775 82.75,64.725 82.75,64.825 83.175,65.25 83.425,65.5 83.425,65.9 83.425,67.725 83.575,67.875 83.85,68.15 84.925,68.15 87.4,68.15 87.8,67.75 89.25,66.3 89.25,65.1 89.25,58.375 88.9,58.025 88.125,58.025 87.6,58.025 87.1,58.525 85.825,59.8 85.825,60.45 85.825,60.675 84.85,61.65 84.75,61.75 83.275,61.75 82.75,61.75
+5V_RELAY on Top Layer "+5V_RELAY_L01_P016" (hatched 90Degree grid 0.15 track 0.2, remove dead copper, pour order 16): 91.5,60.925 91.5,66.6 91.5,66.875 91.775,67.15 92.725,67.15 93.95,67.15 95.625,65.475 99.525,61.575 100.525,61.575 103.675,61.575 105.975,59.275 105.975,58.075 105.975,57.775 106.275,57.475 106.875,56.875 108.9,56.875 110.175,56.875 110.35,56.7 110.5,56.55 110.5,55.875 110.5,55.725 110.3,55.525 110.125,55.35 109.025,55.35 103.45,55.35 103.2,55.6 102.5,56.3 102.5,57.025 102.5,57.5 101.6,58.4 100.125,59.875 98.875,59.875 95.25,59.875 94.85,59.475 93.725,58.35 91.5,58.35
VBAT on Top Layer "VBAT_L01_P018" (hatched 90Degree grid 0.15 track 0.2, remove dead copper, pour order 18): 116,57.75 113.8,57.75 108.35,57.75 107.65,58.45 106.7,59.4 106.7,60.6 106.7,61.325 108.775,61.325 111.525,61.325 111.575,61.275 111.6,61.25 111.6,60.55 111.6,59.975 111.7,59.875 111.85,59.725 112.475,59.725 112.5,59.725 112.65,59.875 112.65,60.525 112.65,61.35 112.775,61.475 112.875,61.575 113.4,61.575 113.8,61.575 113.875,61.5 114,61.375 114.825,61.375 115.5,61.375 115.75,61.125 115.775,61.1 115.775,60.15 115.775,59.825 115.975,59.625 116,59.6 116,59.525
VOUT_F on Top Layer "VOUT_F_L01_P028" (hatched 90Degree grid 0.15 track 0.2, remove dead copper, pour order 28): 62.25,120.25 67.725,120.25 69.925,120.25 70.475,119.7 72.075,118.1 72.075,113.675 72.075,111.9 71.2,111.025 71.075,110.9 68.275,110.9 67.8,110.9 66.725,111.975 66.325,112.375 66.325,114.125 66.325,115.025 65.35,116 65.25,116.1 62.9,116.1 62.6,116.1 62.25,116.45
NetC1_2 on Top Layer "NETC1_2_L01_P026" (hatched 90Degree grid 0.15 track 0.2, remove dead copper, pour order 26): 65.55,114.025 65.55,111.05 65.55,110.75 66.4,109.9 66.575,109.725 67.925,109.725 75.175,109.725 75.7,109.2 76.15,108.79 76.15,108.075 76.15,107.275 76.15,105.7 76.15,105.375 75.65,104.95 74.775,104.95 74.425,104.95 74.225,105.15 73.625,105.75 73.625,106.3 73.625,107.175 73.425,107.375 73.1,107.7 72.5,107.7 64.675,107.7 63.55,108.825 61.25,111.125 61.25,114.025
GND on Bottom Layer "GND_L02_P038" (hatched 90Degree grid 0.15 track 0.2, remove dead copper, pour order 38): 61.238,123.702 151.3,123.702 151.3,28.702 61.238,28.702

## Keep-outs
Keep-Out Layer:
  lines w0.2: 122.6,109 125.5,106.1 125.5,73.5 124.125,73.5 124.125,105.5 122.125,107.5 122,107.5 119.5,107.5 119.5,109 122.6,109 ; 122.6,109 122.6,109 ; 61.238,28.702 61.238,123.702 156.3,123.702 156.3,28.702 61.238,28.702 ; 109.25,110.625 110.375,110.625 110.375,122.75 109.25,122.75 109.25,110.625

## Other copper
Top Layer:
  rectangle net L_IN: 133.825,46.075 152.1,55.05
  pour cut-out: 109.25,123.702 109.25,108.525 110.25,107.525 122.1,107.525 124.125,105.5 124.125,72.05 124.7,71.475 127.425,71.475 128.25,70.65 128.25,28.7 128.252,28.702 156.3,28.702 156.3,123.702
  pour cut-out: 89.125,58.575 91.625,58.575 91.625,66.7 89.125,66.7
  pour cut-out: 83.875,52.25 83.875,49.75 92,49.75 92,52.25
  pour cut-out: 103.975,46.725 106.475,46.725 106.475,45.05 103.975,45.05
  pour cut-out: 107.325,47.55 109.825,47.55 109.825,45.875 107.325,45.875
  pour cut-out: 119.95,49.025 122.45,49.025 122.45,47.35 119.95,47.35
  pour cut-out: 123.275,49.025 125.775,49.025 125.775,47.35 123.275,47.35
  pour cut-out: 113.325,44.575 113.325,47.075 115,47.075 115,44.575
Bottom Layer:
  pour cut-out: 109.25,123.702 109.25,108.525 110.25,107.525 122.1,107.525 124.125,105.5 124.125,72.05 124.7,71.475 127.425,71.475 128.25,70.65 128.25,28.7 128.252,28.702 156.3,28.702 156.3,123.702

## Silkscreen, mask and mechanical layers (free items; w line width, h text height)
Top Overlay:
  lines w0.2: 66.6,120.775 66.6,123.325 97.2,123.325 97.2,120.775 ; 68.775,56.075 69.8,56.075 ; 69.3,55.525 69.3,56.625 ; 72.1,120.75 72.1,123.3 ; 76.1,31.225 76.1,29.2 96.7,29.2 96.7,31.225 ; 76.6,120.775 76.6,123.325 ; 81.2,29.2 81.2,31.25 ; 82.1,120.75 82.1,123.325 ; 86.1,29.2 86.1,31.225 ; 87.2,120.775 87.2,123.325 ; 91.2,29.2 91.2,31.25 ; 92.1,120.75 92.1,123.25 ; 109.4,120.775 109.4,123.325 120,123.325 120,120.775 ; 110.375,31.225 110.375,29.2 126.575,29.2 126.575,31.225 ; 116.075,29.225 116.075,31.25 ; 121.075,29.2 121.075,31.225 ; 130.05,120.775 130.05,123.325 156.25,123.325 156.25,120.775 ; 132.725,31.225 132.725,29.2 148.925,29.2 148.925,31.225 ; 135.55,120.775 135.55,123.325 ; 138.425,29.225 138.425,31.25 ; 140.55,120.75 140.55,123.3 ; 143.425,29.2 143.425,31.225 ; 145.65,120.775 145.65,123.325 ; 151.15,120.75 151.15,123.3
  text "VALVE" at 105.3,123.125 h0.7 r180
  text "VALVE" at 108.925,123.1 h0.7 r180
  text "FUSED" at 70.875,122.9 h0.7 r180
  text "2" at 84.6,122.9 h0.7 r180
  text "1" at 94.625,122.9 h0.7 r180
  text "EARTH" at 118.425,122.775 h1.5 r180
  text "PUMP_N" at 135.05,122.375 h0.8 r180
  text "PUMP_L" at 140.3,122.375 h0.8 r180
  text "MAIN_L" at 145.3,122.375 h0.8 r180
  text "MAIN_N" at 150.7,122.375 h0.8 r180
  text "LFL_L" at 155.675,122.375 h0.8 r180
  text "L_FLW" at 105.4,122.125 h0.7 r180
  text "PUMP" at 101.2,122.075 h0.7 r180
  text "MAIN" at 108.425,122.05 h0.7 r180
  text "+5V" at 70.35,121.85 h0.7 r180
  text "GND" at 75.225,121.85 h0.7 r180
  text "PISTOL" at 81.025,121.85 h0.7 r180
  text "COUNTER" at 86.975,121.85 h0.7 r180
  text "GND" at 90.55,121.85 h0.7 r180
  text "COUNTER" at 97,121.85 h0.7 r180
  text "EARTH" at 122.575,110.475 h2 r90
  text "OUTPUT" at 129.225,108.725 h2 r90
  text "+5V" at 71.95,103.8 h0.8
  text "+12V" at 75.8,103.8 h0.8
  text "+5V" at 81,103.8 h0.8
  text "VIN" at 86.25,103.8 h0.8
  text "+5V" at 91,103.8 h0.8
  text "VIN" at 96.4,103.8 h0.8
  text "KB" at 71.15,96.725 h1 r270
  text "ISP" at 62.3,86.1 h1
  text "RST" at 65.425,86.075 h1
  text "Controller TRK" at 154.85,78.55 h2 r90
  text "PROG" at 69.875,71.375 h1 r90
  text "BATTERY" at 127.975,54.275 h1 r90
  text "8A 250V 5x20mm" at 154.825,50.8 h1 r90
  text "INPUT" at 152.825,29.775 h3 r90
  text "N" at 140.425,29.75 h1
  text "L" at 145.725,29.75 h1
  text "VIN" at 77.375,29.675 h1
  text "GND" at 82.275,29.675 h1
  text "CANH" at 86.975,29.675 h1
  text "CANL" at 92.075,29.675 h1
  text "SCL" at 111.9,29.675 h1
  text "SDA" at 117.275,29.675 h1
  text "PULSE" at 121.525,29.675 h1
  text "EARTH" at 133.25,29.675 h1
  text "ERROR" at 98.65,29.175 h1 r90
  text "STATE" at 108.225,29.175 h1 r90